# EAGLE board oscilloscope lcd v2 (EAGLE 9.7.0)
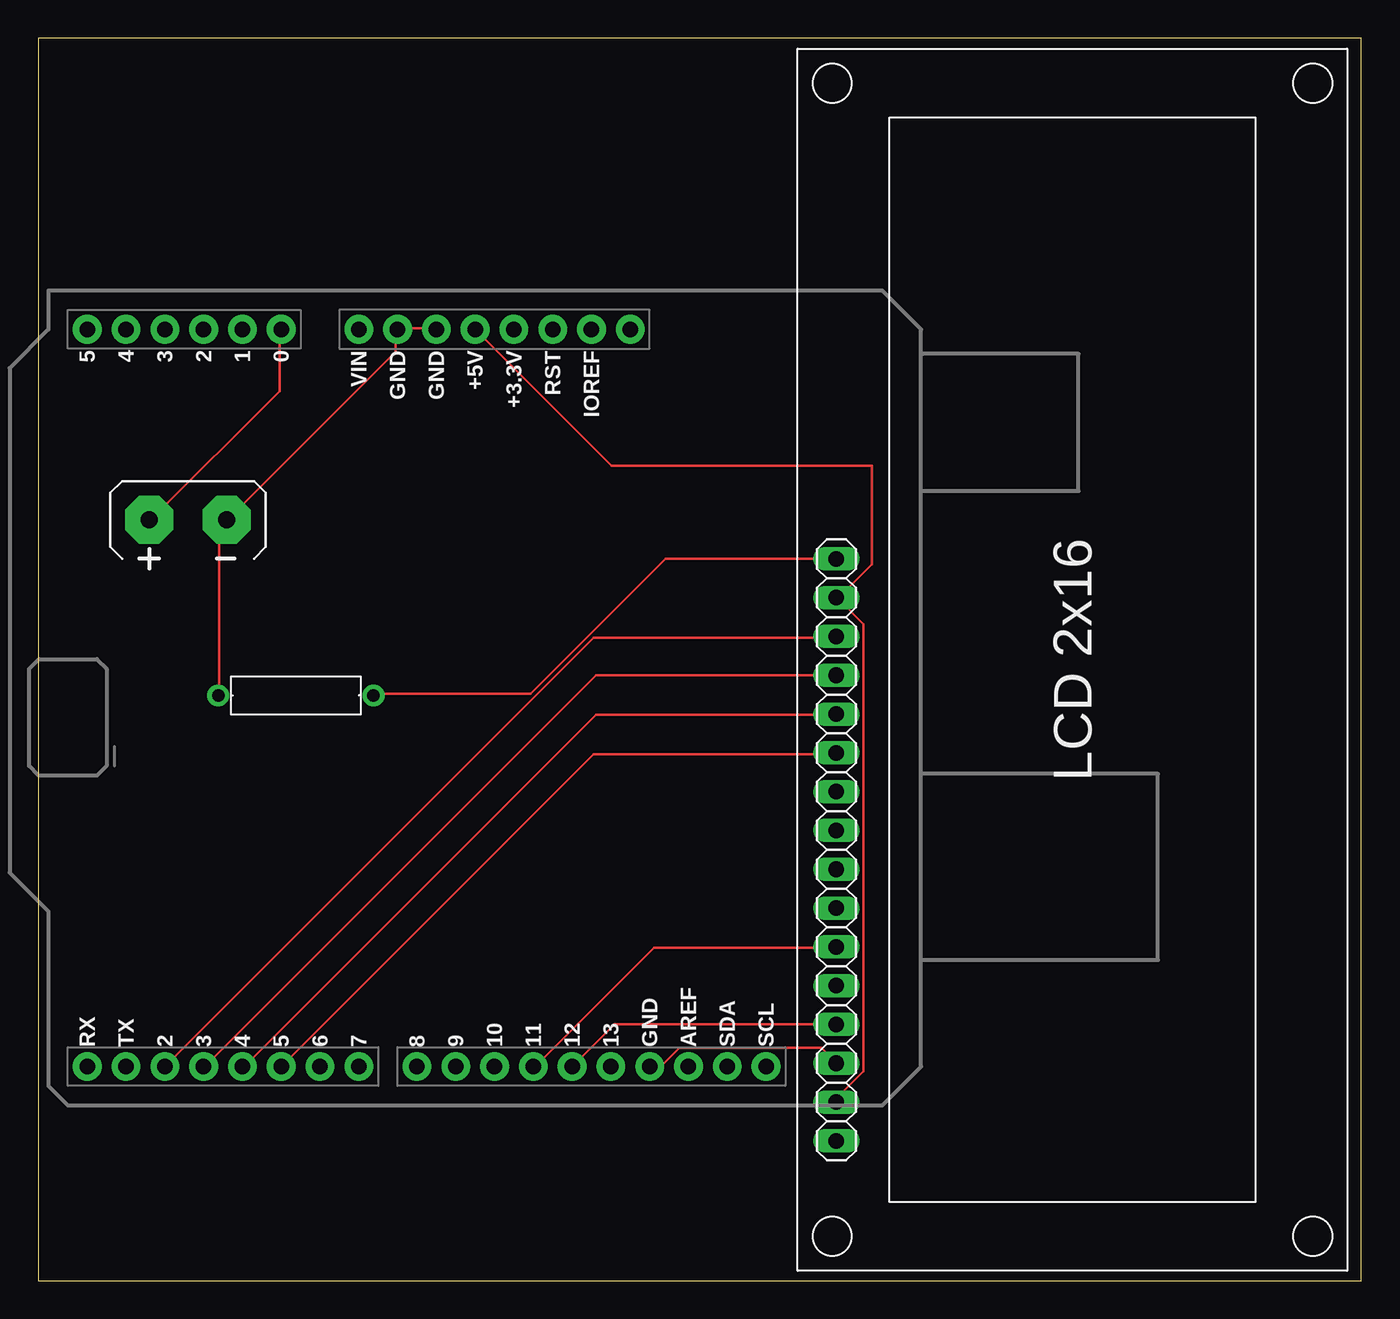
[diagram p0: board, top side]
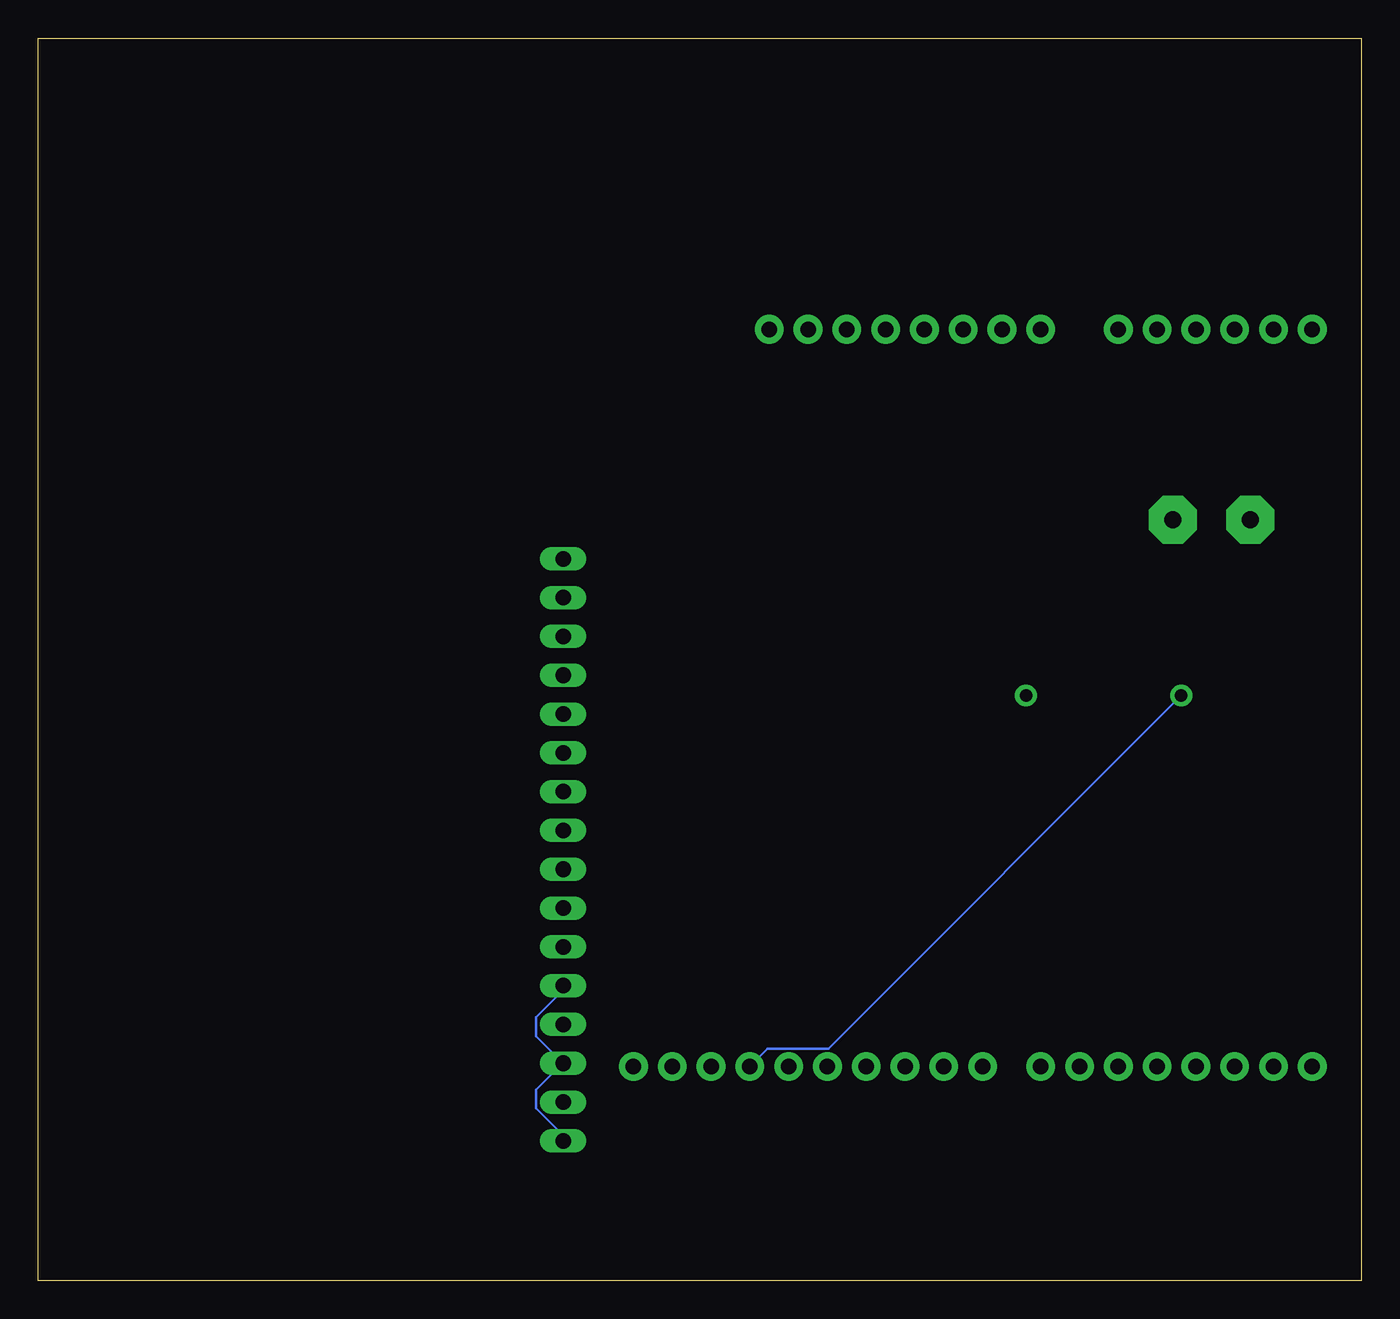
[diagram p1: board, bottom side, seen from below]

Size 86.65 x 81.33 mm. Coordinates in mm from the lower left corner, seen from the top.
Outline: 0,0 86.65,0 86.65,81.33 0,81.33 0,0
Copper layers (1*16): Top / Bottom
Stack-up Default Layer Stack: Top User Defined 0.035mm / Dielectric-1 User Defined 1.5mm / Bottom User Defined 0.035mm
Design rules "default": minimum track width 6mil, minimum drill 0.35mm, track to track 6mil, track to pad 6mil, pad to pad 6mil, via to via 6mil, smd to smd 6mil, copper to edge 40mil, drill to drill 6mil, minimum pad ring 10mil, minimum via ring 8mil, stop-mask expansion 4mil, vias tented up to drill 0mil, thermal gap 10mil

## Footprints (pad centres in the part's own frame; a part is rotated, then mirrored left to right if it is on the bottom)
BATTERY-GENERIC = drill 1.118 pad 3.15 octagon: + 2.54,0; - -2.54,0
RESAD1016W63L850D250B = drill 0.83 pad 1.43: 1 -5.08,0; 2 5.08,0
ARDUINO-UNO-R3-SHIELD = drill 1.016 pad 1.88: 3.3V 24.13,-2.54; 5V 24.13,0; A0 24.13,12.7; A1 24.13,15.24; A2 24.13,17.78; A3 24.13,20.32; A4 24.13,22.86; A5 24.13,25.4; AREF -24.13,-13.97; D2 -24.13,20.32; D3 -24.13,17.78; D4 -24.13,15.24; D5 -24.13,12.7; D6 -24.13,10.16; D7 -24.13,7.62; D8 -24.13,3.81; D9 -24.13,1.27; D10 -24.13,-1.27; D11 -24.13,-3.81; D12 -24.13,-6.35; D13 -24.13,-8.89; GND@0 24.13,2.54; GND@1 24.13,5.08; GND@2 -24.13,-11.43; IOREF 24.13,-7.62; NC 24.13,-10.16; RES 24.13,-5.08; RX -24.13,25.4; SCL -24.13,-19.05; SDA -24.13,-16.51; TX -24.13,22.86; VIN 24.13,7.62
JHD-162A = drill 1.016 long: 1 -19.05,0; 2 -16.51,0; 3 -13.97,0; 4 -11.43,0; 5 -8.89,0; 6 -6.35,0; 7 -3.81,0; 8 -1.27,0; 9 1.27,0; 10 3.81,0; 11 6.35,0; 12 8.89,0; 13 11.43,0; 14 13.97,0; 15 16.51,0; 16 19.05,0

## Placement (x,y rotation side)
FUNC1  FUNCTION-GENERATOR  [BATTERY-GENERIC]  9.81,49.8 180 top
R1  1k  [RESAD1016W63L850D250B]  16.88,38.3 180 top
U1  ARDUINO-UNO-R3-SHIELD  [ARDUINO-UNO-R3-SHIELD]  28.61,38.14 90 top
U2  LCD-16X2JHD-162A  [JHD-162A]  52.27,28.19 90 top

## Library data of the parts
FUNC1 R1 U1 U2 = Tinkercad

## Nets
FUNC1+: FUNC1.+ U1.A0
FUNC1-: FUNC1.- R1.2 U1.GND@0 U1.GND@1 U1.GND@2 U2.1 U2.3 U2.5
U1_5V: U1.5V U2.2 U2.15
U1_D2: U1.D2 U2.14
U1_D3: U1.D3 U2.13
U1_D4: U1.D4 U2.12
U1_D5: U1.D5 U2.11
U1_D11: U1.D11 U2.6
U1_D12: U1.D12 U2.4
U2_LED-: R1.1 U2.16

## Tracks (layer width: path | path; a pad name or v marks a point on that pad's centre or on a via)
FUNC1+
  Top 0.152: U1.A0 15.8,62.18 15.8,58.22 7.42,49.83 FUNC1.+
FUNC1-
  Top 0.152: U1.GND@2 40.18,14.02 40.79,14.02 42.01,15.24 51.31,15.24 52.22,14.33 U2.3 | U1.GND@0 26.01,62.33 23.57,62.33 U1.GND@1 23.42,62.18 23.42,60.81 12.45,49.83 FUNC1.- 12.29,49.68 11.84,49.22 11.84,38.41 R1.2
  Bottom 0.152: U2.1 52.38,9.14 52.38,9.6 54.05,11.28 54.05,12.5 52.38,14.17 U2.3 54.05,16 54.05,17.22 52.38,18.9 52.38,19.2 U2.5 | R1.2 11.84,38.25 34.91,15.18 38.87,15.18 U1.GND@2
U1_5V
  Top 0.152: 52.38,44.65 54.05,42.98 54.05,13.72 52.38,12.04 52.38,11.74 U2.2 | 52.38,44.65 U2.15 | U1.5V 37.54,53.34 54.61,53.34 54.61,46.89 52.38,44.65
U1_D2
  Top 0.152: U2.14 52.22,42.06 36.37,42.06 8.33,14.02 U1.D2
U1_D3
  Top 0.152: U2.13 36.53,39.62 10.92,14.02 U1.D3
U1_D4
  Top 0.152: U2.12 52.22,37.03 36.53,37.03 13.51,14.02 U1.D4
U1_D5
  Top 0.152: U2.11 52.22,34.44 36.37,34.44 15.95,14.02 U1.D5
U1_D11
  Top 0.152: U2.6 52.22,21.79 40.34,21.79 32.56,14.02 U1.D11
U1_D12
  Top 0.152: U2.4 37.74,16.76 35,14.02 U1.D12
U2_LED-
  Top 0.152: U2.16 41.1,47.24 32.26,38.41 22.05,38.41 R1.1